# Altium PCB PCB7.PcbDoc (part 2 of 2)
Units mil, origin at the board's own origin, x right, y up, seen from the top; angles counter-clockwise.
Board outline 3935 x 3935 mil, 2 copper layers (Top Layer, Bottom Layer); 49 components, 133 nets, 415 pads, 69 vias.
Unrouted connection lines stored in the file: 1.
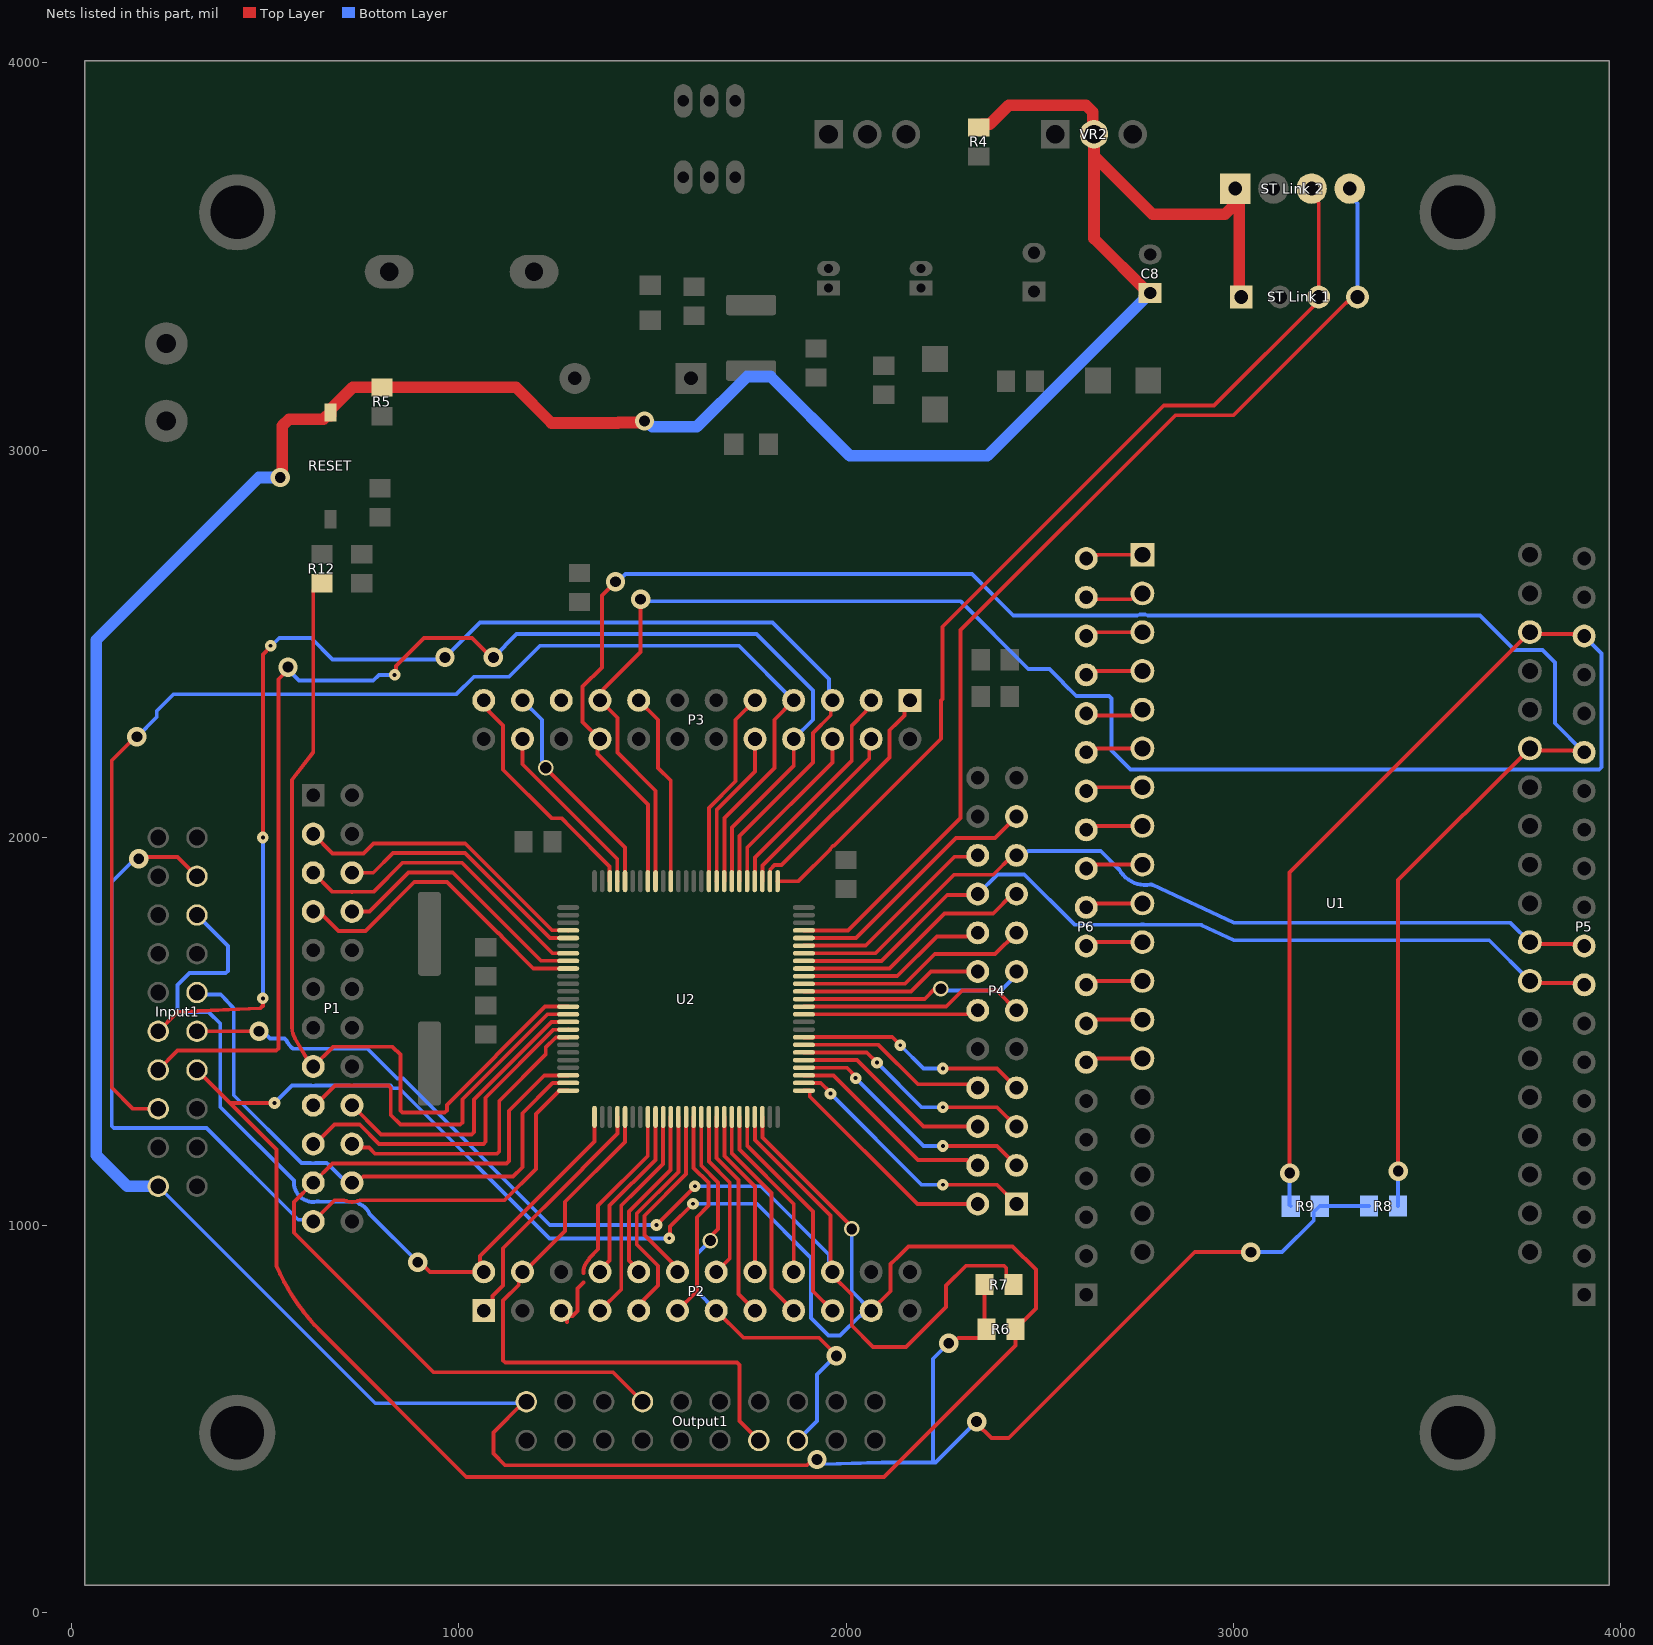
[diagram p2: the nets of this part, all layers, seen from the top]

## Via types
v1: diameter 50, hole 28, Top Layer to Bottom Layer, 38 vias
v2: diameter 30, hole 10, Top Layer to Bottom Layer, 17 vias
v3: diameter 40, hole 28, Top Layer to Bottom Layer, 12 vias
v4: diameter 40, hole 30, Top Layer to Bottom Layer, 1 vias
v5: diameter 47.24, hole 23.62, Top Layer to Bottom Layer, 1 vias

## Nets (pads, with @x,y where several pads share a name; then routed paths per layer and width w, separated by ;. In a path a pad name is that pad's centre, name@x,y a point inside that pad or via, vN(x,y) a via of type N, cw(c..) or ccw(c..) an arc to the next point about the centre after c; other vN are vias at no path point) (continued)
NetP6_7: P6.7 U1.J2-14 | length 145
  Top Layer w10: P6.7@2620,1430 U1.J2-14@2765,1430
NetP6_8: P6.8 U1.J2-13 | length 145
  Top Layer w10: P6.8@2620,1530 U1.J2-13@2765,1530
NetP6_9: P6.9 U1.J2-12 | length 145
  Top Layer w10: P6.9@2620,1630 U1.J2-12@2765,1630
NetP6_10: P6.10 U1.J2-11 | length 145
  Top Layer w10: P6.10@2620,1730 U1.J2-11@2765,1730
NetP6_11: P6.11 U1.J2-10 | length 145
  Top Layer w10: P6.11@2620,1830 U1.J2-10@2765,1830
NetP6_12: P6.12 U1.J2-9 | length 145
  Top Layer w10: P6.12@2620,1930 U1.J2-9@2765,1930
NetP6_13: P6.13 U1.J2-8 | length 145
  Top Layer w10: P6.13@2620,2030 U1.J2-8@2765,2030
NetP6_14: P6.14 U1.J2-7 | length 145
  Top Layer w10: P6.14@2620,2130 U1.J2-7@2765,2130
NetP6_15: P6.15 U1.J2-6 | length 145
  Top Layer w10: P6.15@2620,2230 U1.J2-6@2765,2230
NetP6_16: P6.16 U1.J2-5 | length 153.3
  Top Layer w10: P6.16@2620,2320 2625,2315 2736.09,2315 2751.09,2330 U1.J2-5@2765,2330
NetP6_17: P6.17 U1.J2-4 | length 145
  Top Layer w10: P6.17@2620,2430 U1.J2-4@2765,2430
NetP6_18: P6.18 U1.J2-3 | length 145
  Top Layer w10: P6.18@2620,2530 U1.J2-3@2765,2530
NetP6_19: P6.19 U1.J2-2 | length 157.4
  Top Layer w10: P6.19@2620,2630 2635,2615 2736.09,2615 2751.09,2630 U1.J2-2@2765,2630
NetP6_20: P6.20 U1.J2-1 | length 149.1
  Top Layer w10: P6.20@2620,2720 2629.39,2729.39 2649.77,2729.39 2650.39,2730 U1.J2-1@2765,2730
Pin_04: P1.3 U2.4 | length 782.5
  Top Layer w10: P1.3@625,2009.13 675,1959.13 755,1959.13 780.87,1985 1017.27,1985 1241.49,1760.78 1282.72,1760.78 U2.4@1283.07,1760.43
Pin_05: P1.6 U2.5 | length 670
  Top Layer w10: P1.6@725,1909.13 780,1909.13 830.87,1960 1016.82,1960 1236.07,1740.75 U2.5@1283.07,1740.75
Pin_07: P1.5 U2.7 | length 806.3
  Top Layer w10: P1.5@625,1909.13 671.21,1862.93 674.13,1860 718.77,1860 ccw(c725,1909.13) 731.23,1860 780.87,1860 855.87,1935 1009.13,1935 1242.76,1701.38 U2.7@1283.07,1701.38
Pin_08: P1.8 U2.8 | length 694.4
  Top Layer w10: P1.8@725,1809.13 770,1809.13 870.87,1910 985,1910 1212.96,1682.04 1282.72,1682.04 U2.8@1283.07,1681.69
Pin_09: P1.7 U2.9 | length 809.1
  Top Layer w10: P1.7@640,1809.13 690,1759.13 760,1759.13 885.87,1885 970,1885 1101.67,1753.33 1103.08,1753.33 1110.69,1745.72 1110.69,1744.31 1192.99,1662.01 U2.9@1283.07,1662.01
Pin_15: P1.17 U2.15 | length 895.6
  Top Layer w10: P1.17@640,1319.13 680.87,1360 819.14,1360 825,1354.14 825,1284.13 850,1259.13 1004.14,1259.13 1010,1264.99 1010,1324.54 1229.35,1543.9 U2.15@1283.07,1543.9
Pin_16: P1.18 U2.16 | length 758.6
  Top Layer w10: P1.18@725,1309.13 800,1234.13 1034.14,1234.13 1040,1239.99 1040,1324.13 1239.73,1523.87 1282.72,1523.87 U2.16@1283.07,1524.21
Pin_17: P1.19 U2.17 | length 888.4
  Top Layer w10: P1.19@625,1209.13 630,1209.13 680,1259.13 745,1259.13 795,1209.13 1064.14,1209.13 1070,1214.99 1070,1328.68 1245.5,1504.18 1282.72,1504.18 U2.17@1283.07,1504.53
Pin_18: P1.20 U2.18 | length 779.8
  Top Layer w10: P1.20@725,1209.13 734.39,1199.75 769.07,1199.75 784.69,1184.13 1099.14,1184.13 1105,1189.99 1105,1320 1225,1440 1225,1458.22 1250.84,1484.06 1258.37,1484.06 1258.81,1484.5 1282.72,1484.5 U2.18@1283.07,1484.84
Pin_29: P2.1 U2.29 | length 642.9
  Top Layer w10: P2.1@1065,779.13 1087.63,801.77 1087.63,816.77 1115,844.13 1115,940 1320,1145 1320,1145.86 1404.14,1230 1410,1235.86 U2.29@1410.04,1279.13 U2.29@1410.04,1279.13
Pin_33: P2.5 U2.33 | length 622.5
  Top Layer w10: 1280,749.13 P2.5@1280,765 ; P2.5@1280,790 P2.5@1280,765 ; 1322.53,851.67 1307.53,836.67 1307.53,778.39 1294.14,765 P2.5@1280,765 ; 1322.53,876.68 1322.53,876.92 cw(c1365,879.13) 1334.57,908.85 cw(c1364.82,879.32) 1334.8,909.08 ccw(c1327.67,916.09) 1337.61,915.03 1360,937.42 1360,1050 1488.43,1178.43 1488.43,1278.79 U2.33@1488.78,1279.13
Pin_34: P2.8 U2.34 | length 459.4
  Top Layer w10: P2.8@1365,879.13 1365,883.82 1390,908.82 1390,1050 1508.12,1168.12 1508.12,1278.79 U2.34@1508.46,1279.13
Pin_35: P2.7 U2.35 | length 567.6
  Top Layer w10: P2.7@1365,779.13 1420,834.13 1420,1050 1462,1092 1488,1118 1527.8,1157.8 1527.8,1278.79 U2.35@1528.15,1279.13
Pin_36: P2.10 U2.36 | length 455
  Top Layer w10: P2.10@1465,879.13 1465,883.82 1440,908.82 1440,1035 1547.49,1142.49 1547.49,1278.79 U2.36@1547.83,1279.13
Pin_37: P2.9 U2.37 | length 588
  Top Layer w10: P2.9@1465,779.13 1465,792.41 1478.99,806.39 1478.99,808.12 1515,844.13 1515,895 1460,950 1460,1029.54 1567.52,1137.06 U2.37@1567.52,1279.13
Pin_38: P2.12 U2.38 | length 479.6
  Top Layer w10: P2.12@1565,879.13 1565,889.13 1533,921.13 1533,921.59 1480,974.59 1480,1024.09 1587.2,1131.29 U2.38@1587.2,1279.13
Pin_39: P2.11 U2.39 | length 548.9
  Top Layer w10: P2.11@1565,779.13 1615,829.13 1615,1020 1645,1050 1645,1109.54 1606.89,1147.65 U2.39@1606.89,1279.13
Pin_41: P2.14 U2.41 | length 436.8
  Top Layer w10: U2.41@1646.26,1279.13 1646.26,1163.74 1700,1110 1700,914.13 P2.14@1665,879.13
Pin_42: P2.15 U2.42 | length 541
  Top Layer w10: U2.42@1665.94,1279.13 1665.94,1173.14 1722.47,1116.62 1722.47,821.66 P2.15@1765,779.13
Pin_43: P2.16 U2.43 | length 432.9
  Top Layer w10: U2.43@1685.63,1279.13 1685.98,1278.79 1685.98,1178.57 1765,1099.54 P2.16@1765,879.13
Pin_44: P2.17 U2.44 | length 566.1
  Top Layer w10: U2.44@1705.32,1279.13 1705.32,1184.68 1807.53,1082.47 1807.53,836.61 P2.17@1865,779.13
Pin_45: P2.18 U2.45 | length 458
  Top Layer w10: U2.45@1725,1279.13 1725.35,1278.79 1725.35,1194.65 1865,1055 P2.18@1865,879.13
Pin_46: P2.19 U2.46 | length 567.4
  Top Layer w10: U2.46@1744.69,1279.13 U2.46@1745,1278.82 ; U2.46@1745,1255 1745,1205 1915,1035 1915,829.13 P2.19@1965,779.13
Pin_51: P4.2 U2.51 | length 578.3
  Top Layer w10: U2.51@1891.34,1347.05 1905.55,1347.05 1906.39,1346.21 1906.39,1332 2184.25,1054.13 P4.2@2340,1054.13
Pin_52: P4.1 U2.52 | length 679.6
  Top Layer w10: U2.52@1891.34,1366.73 1934.88,1366.73 1960,1341.61 v2(1960,1339.13) ; v2(2250,1104.13) 2390,1104.13 P4.1@2440,1054.13
  Bottom Layer w10: v2(1960,1339.13) 2195,1104.13 v2(2250,1104.13)
Pin_53: P4.4 U2.53 | length 544.9
  Top Layer w10: U2.53@1891.34,1386.42 1967.72,1386.42 2186.01,1168.12 2312.74,1168.12 2326.73,1154.13 P4.4@2340,1154.13
Pin_54: P4.3 U2.54 | length 655.6
  Top Layer w10: U2.54@1891.34,1406.1 2002.47,1406.1 2025,1383.57 v2(2025,1379.13) ; v2@2240,1204.13 2390,1204.13 P4.3@2440,1154.13
  Bottom Layer w10: v2(2025,1379.13) 2200,1204.13 v2@2240,1204.13
  other v2: 2250,1204.13
Pin_55: P4.6 U2.55 | length 519.8
  Top Layer w10: U2.55@1891.34,1425.79 2028.35,1425.79 2200,1254.13 P4.6@2340,1254.13
Pin_56: P4.5 U2.56 | length 641.2
  Top Layer w10: U2.56@1891.34,1445.47 2053.66,1445.47 v2(2080,1419.13) ; v2@2245,1304.13 2390,1304.13 P4.5@2440,1254.13 P4.5@2426.73,1254.13
  Bottom Layer w10: v2(2080,1419.13) 2195,1304.13 v2@2245,1304.13
  other v2: 2250,1304.13
Pin_57: P4.8 U2.57 | length 494.6
  Top Layer w10: U2.57@1891.34,1465.16 2083.98,1465.16 2185.61,1363.52 2330.61,1363.52 P4.8@2340,1354.13
Pin_58: P4.7 U2.58 | length 627.7
  Top Layer w10: U2.58@1915.97,1484.13 1915.6,1484.5 1891.68,1484.5 U2.58@1891.34,1484.84 2119.29,1484.84 v2(2140,1464.13) ; v2@2240,1404.13 2390,1404.13 P4.7@2440,1354.13
  Bottom Layer w10: v2(2140,1464.13) 2200,1404.13 v2@2240,1404.13
  other v2: 2250,1404.13
Pin_61: P4.12 U2.61 | length 452.9
  Top Layer w10: U2.61@1891.34,1543.9 2316.49,1543.9 2326.73,1554.13 P4.12@2340,1554.13
Pin_62: P4.11 U2.62 | length 586.9
  Top Layer w10: U2.62@1891.34,1563.58 2258.58,1563.58 2300,1605 2389.13,1605 P4.11@2440,1554.13
Pin_63: P4.13 U2.63 | length 592.5
  Top Layer w10: U2.63@1891.34,1583.27 2203.27,1583.27 2230,1610 v3(2245,1610) ; P4.13@2435,1654.13 P4.13@2440,1654.13
  Bottom Layer w10: v3(2245,1610) 2250,1605 2400,1605 2440,1645 P4.13@2440,1654.13
Pin_64: P4.14 U2.64 | length 469.9
  Top Layer w10: U2.64@1891.34,1602.95 2167.95,1602.95 2219.13,1654.13 P4.14@2340,1654.13
Pin_65: P4.15 U2.65 | length 603.1
  Top Layer w10: U2.65@1891.34,1622.64 2152.64,1622.64 2229.13,1699.13 2385,1699.13 P4.15@2440,1754.13
Pin_66: P4.16 U2.66 | length 495
  Top Layer w10: U2.66@1891.34,1642.32 2132.32,1642.32 2234.75,1744.75 2330.61,1744.75 P4.16@2340,1754.13
Pin_67: P4.17 U2.67 | length 628.2
  Top Layer w10: U2.67@1891.34,1662.01 2112.01,1662.01 2254.13,1804.13 2380,1804.13 2430,1854.13 P4.17@2440,1854.13
Pin_70: P4.20 U2.70 | length 545.2
  Top Layer w10: U2.70@1891.34,1721.06 2051.06,1721.06 2280.46,1950.46 2336.33,1950.46 P4.20@2340,1954.13
Pin_71: P4.21 U2.71 | length 678.5
  Top Layer w10: U2.71@1891.34,1740.75 1891.68,1741.1 2026.1,1741.1 2284.13,1999.13 2385,1999.13 P4.21@2440,2054.13
Pin_77: P3.1 U2.77 | length 627.4
  Top Layer w10: U2.77@1803.74,1887.4 1804.09,1887.75 1804.09,1911.67 1804.52,1912.1 1804.52,1917.87 1815.59,1928.95 1833.95,1928.95 2111.83,2206.83 2111.83,2276.83 2135,2300 2135.43,2300 2150.89,2315.46 2150.89,2340.03 P3.1@2165,2354.13
Pin_78: P3.4 U2.78 | length 483.1
  Top Layer w10: U2.78@1784.06,1887.4 1784.06,1928.19 2060,2204.13 2060,2249.13 P3.4@2065,2254.13
Pin_79: P3.3 U2.79 | length 591.3
  Top Layer w10: U2.79@1764.37,1887.4 1764.72,1887.75 1764.72,1948.85 2015,2199.13 2015,2289.13 2051.01,2325.15 2051.01,2326.87 2065,2340.86 P3.3@2065,2354.13
Pin_80: P3.6 U2.80 | length 458
  Top Layer w10: U2.80@1744.69,1887.4 1745.03,1887.75 1745.03,1974.17 1965,2194.13 P3.6@1965,2254.13
Pin_84: P3.10 U2.84 | length 407.8
  Top Layer w10: U2.84@1665.94,1887.4 1666.29,1887.75 1666.29,2071.29 1765,2170 P3.10@1765,2254.13
Pin_85: P3.9 U2.85 | length 515.9
  Top Layer w10: U2.85@1646.26,1887.4 1646.26,2076.72 1715,2145.46 1715,2304.13 P3.9@1765,2354.13
Pin_90: P3.15 U2.90 | length 501
  Top Layer w10: P3.15@1465,2354.13 1515,2304.13 1515,2180 1547.83,2147.17 U2.90@1547.83,1887.4
Pin_94: P3.19
Pin_96: P3.21 U2.96 | length 580.5
  Top Layer w10: P3.21@1165,2350 P3.21@1165,2354.13 ; v4(1225,2180) 1225,2179.13 1429.72,1974.41 U2.96@1429.72,1887.4
  Bottom Layer w10: P3.21@1165,2354.13 1215,2304.13 1215,2198.12 1225,2188.12 v4(1225,2180)
Pin_97: P3.22 U2.97 | length 468.2
  Top Layer w10: P3.22@1165,2254.13 1165,2189.13 1409.78,1944.35 1409.78,1887.66 U2.97@1410.04,1887.4
Pin_98: P3.23 U2.98 | length 616.3
  Top Layer w10: P3.23@1065,2354.13 1065,2340.86 1078.99,2326.87 1078.99,2325.15 1115,2289.13 1115,2175 1240,2050 1265.35,2050 1288.79,2026.56 1390.01,1925.34 1390.01,1887.75 U2.98@1390.35,1887.4
PUlSE_STEPPER: Output1.4 P1.21 U2.23 | length 2079.5
  Top Layer w10: U2.23@1283.07,1386.42 1221.42,1386.42 1130,1295 1130,1164.99 1124.14,1159.13 675,1159.13 P1.21@625,1109.13 575,1059.13 575,980 935,620 1399.13,620 Output1.4@1475,544.13
PWML: Output1.18 P2.13 U2.40 | length 1185.4
  Top Layer w10: U2.40@1626.57,1279.13 1626.57,1153.43 1670,1110 1670,990 1654.31,974.31 1654.31,964.31 v3(1650,960) ; P2.13@1665,782.59 P2.13@1665,779.13 1735,709.13 1930,709.13 1975.25,663.89 v1(1975.25,662.36)
  Bottom Layer w10: v3(1650,960) 1615,925 1615,829.13 P2.13@1665,779.13 ; Output1.18@1875,444.13 1925,494.13 1925,614.13 1973.23,662.36 v1(1975.25,662.36)
PWMR: Output1.17 P2.4 U2.30 | length 1598.5
  Top Layer w10: P2.4@1165,879.13 1155.61,869.75 1155.61,845.61 1115,805 1115,650.86 1120.86,645 1719.14,645 1725,639.14 1725,494.13 Output1.17@1775,444.13 ; P2.4@1170,880 1275,985 1275,1060 1429.72,1214.72 U2.30@1429.72,1279.13
  Bottom Layer w10: Output1.17@1775,444.13 Output1.17@1783.63,452.77
Reset: P1.15 R12.2 U2.14 | length 2248.9
  Top Layer w10: R12.2@647.61,2656.56 643.67,2656.56 625.05,2637.94 625.05,2220.05 570.47,2149.02 570.47,1509.13 ccw(c625,1509.13) 578.11,1481.31 615,1419.13 P1.15@625,1409.13 675.87,1460 830,1460 850,1440 850,1295.86 855.86,1290 964.14,1290 970,1295.86 970,1310 1223.58,1563.58 U2.14@1283.07,1563.58
RX_ESP32: P4.19 P5.10 U1.J3-11 U2.69 | length 2203.9
  Top Layer w10: U2.69@1891.34,1701.38 2076.38,1701.38 2279.13,1904.13 2380,1904.13 2430,1954.13 P4.19@2440,1954.13 ; U1.J3-11@3765,1730 3770,1725 3900,1725 P5.10@3905,1720
  Bottom Layer w10: P4.19@2440,1954.13 2449.39,1963.52 2468.91,1963.52 2470.39,1965 2657.5,1965 2703.7,1918.8 2704.07,1918.43 2704.95,1917.55 ccw(c2776.91,1959.88) 2743.87,1883.21 ccw(c2771.81,1948.06) 2785.31,1878.75 2786.24,1878.75 2788.45,1878.75 2790.45,1877.82 3000.96,1780 3715,1780 3717.93,1777.07 U1.J3-11@3765,1730
RX_HC05: Input1.18 P2.2 U2.26 | length 2120.7
  Top Layer w10: v1(895,904.13) 901.57,904.13 926.57,879.13 P2.2@1065,879.13 1055.61,888.52 1055.61,920.61 1350.98,1215.98 U2.26@1350.98,1279.13
  Bottom Layer w10: Input1.18@325,1800 405,1720 405,1655.86 399.14,1650 306.95,1650 305.48,1650 275,1619.52 275,1555.86 280.86,1550 355,1550 385,1520 385,1305 575.49,1114.51 575.49,1110.37 cw(c565.49,1110.37) 575.48,1110.26 ccw(c625,1109.13) 589.82,1074.27 ; 589.83,1074.27 ccw(c619.39,1103.53) 589.98,1074.11 ccw(c625,1109.13) 634.45,1060.52 cw(c636.33,1050.7) 640,1060 643.76,1060 718.77,1060 ccw(c725,1109.13) 731.23,1060 739.13,1060 742.06,1057.07 743.15,1055.98 744.45,1054.68 cw(c725,1009.13) 770.55,1028.59 771.85,1027.28 v1(895,904.13)
SCL_ESP32: P3.17 P5.18 R9.1 U1.J3-3 U2.92 | length 5968.1
  Top Layer w10: v1(1470,2615) 1470,2479.13 1374.39,2383.52 1374.39,2363.52 P3.17@1365,2354.13 1410,2309.13 1410,2219.13 1508.46,2120.67 U2.92@1508.46,1887.4 ; v1(3145,1134.13) 3145,1910 U1.J3-3@3765,2530 3770,2525 3900,2525 P5.18@3905,2520
  Bottom Layer w10: v1(1470,2615) 1475,2610 2295,2610 2470.39,2434.61 2525.39,2434.61 2560,2400 2560,2399.06 2594.06,2365 2679.14,2365 2685,2359.14 2685,2225 2731.6,2178.4 2734.53,2175.47 2760.36,2175.47 cw(c2765,2130) 2769.64,2175.47 3760.36,2175.47 cw(c3765,2130) 3769.64,2175.47 3943.67,2175.47 3949.53,2181.33 3949.53,2475.47 P5.18@3905,2520 3905,2525 3905,2530 3900,2525 3770,2525 U1.J3-3@3765,2530 ; v1(3145,1134.13) 3145,1051.69 R9.1@3147.77,1048.92
SCL_Oled: Input1.15 P2.20 R7.1 U2.47 | length 3211.3
  Top Layer w10: Input1.15@325,1500 v1(485,1500) ; v2(1511,1000) 1511,1000.6 1610,1099.6 v2(1610,1100) ; U2.47@1764.37,1279.13 U2.47@1764.72,1278.79 ; U2.47@1765,1260 1765,1219.54 1960,1024.54 1960,884.13 P2.20@1965,879.13 ; P2.20@1965,870 2015,820 2015,740 2070,685 2155,685 2258.55,788.55 2258.55,843.55 2310,895 2407.75,895 2413.61,889.14 2413.61,865.15 R7.1@2432.23,846.53
  Bottom Layer w10: v1(485,1500) 495,1500 497.93,1497.07 510.48,1484.52 513.41,1481.59 550.99,1481.59 553.92,1478.66 554.86,1477.73 ; 554.86,1477.72 ccw(c648.15,1530.59) 555.49,1476.63 ccw(c648.15,1530.59) 569.05,1458.19 ccw(c576.38,1465) 576.3,1455 765,1455 842,1378 857.46,1378 1235.46,1000 v2(1511,1000) ; v2(1610,1100) 1780,1100 1955.61,924.39 1955.61,888.52 P2.20@1965,879.13
SDA_ESP32: P3.18 P5.15 R8.1 U1.J3-6 U2.93 | length 5139.7
  Top Layer w10: v1(1405,2660) 1370,2625 1370,2439.13 1320.47,2389.61 1320.47,2298.66 P3.18@1365,2254.13 1358.67,2247.8 1358.67,2215.46 1488.78,2085.35 U2.93@1488.78,1887.4 ; v1(3425,1139.13) 3425,1890 U1.J3-6@3765,2230 3770,2225 3900,2225 P5.15@3905,2220
  Bottom Layer w10: v1(1405,2660) 1410.86,2660 1430.86,2680 2325,2680 2431.57,2573.43 2749.26,2573.43 ccw(c2749.22,2583.43) 2752.02,2573.83 cw(c2765,2530) 2778.01,2573.82 ccw(c2780.78,2583.43) 2780.72,2573.43 3636.01,2573.43 3725.15,2484.29 3797.41,2484.29 3830,2451.71 3830,2295 P5.15@3905,2220 ; R8.1@3424.46,1049.13 3425,1049.68 v1(3425,1139.13)
SDA_Oled: Input1.14 P2.21 R6.1 U2.48 | length 6429.2
  Top Layer w10: Input1.14@325,1400 410,1315 ; v2(525,1315) 410,1315 ; v2(1543.96,966.04) 1546.04,968.11 1546.04,996.04 v2(1605,1055) ; U2.48@1784.06,1279.13 1784.4,1278.79 1784.4,1225.6 2015,995 v3(2015,990) ; P2.21@2065,779.13 2115,829.13 2115,899.13 2128.78,912.91 cw(c2165,879.13) 2131.22,915.36 2160.87,945 2430,945 2490,885 2490,785 2459.09,754.09 2455.85,754.09 2437.23,735.47 2437.23,688.97 2303.26,555 2098.26,350 1020,350 646.26,723.74 cw(c1035.33,1112.81) 530,895.11 530,1195 410,1315
  Bottom Layer w10: v2(525,1315) 570,1360 618.17,1360 ; 618.21,1360 cw(c618.17,1350) 619.34,1359.93 ccw(c625,1409.13) 630.72,1359.94 cw(c631.83,1350) 631.83,1360 718.17,1360 ; 718.21,1360 cw(c718.17,1350) 719.34,1359.93 ccw(c725,1409.13) 730.72,1359.94 cw(c731.83,1350) 731.83,1360 824.64,1360 831.64,1353 847,1353 1235,965 1542.93,965 v2(1543.96,966.04) ; v2(1605,1055) 1770,1055 1910,915 1910,760 1955,715 1985,715 2035.58,765.58 2038.17,765.58 2051.73,779.13 P2.21@2065,779.13 2015,829.13 v3(2015,990)
Start_Button: Input1.3 P3.7 U2.83 | length 3477.7
  Top Layer w10: v1(170,2260) 165.82,2260 105,2199.18 105,1355 160,1300 Input1.3@225,1300 ; U2.83@1685.63,1887.4 1685.98,1887.75 1685.98,2050.98 1815,2180 1815,2304.13 P3.7@1865,2354.13
  Bottom Layer w10: v1(170,2260) 221.33,2311.33 221.33,2326.33 265,2370 995,2370 1040,2415 1130,2415 1210,2495 1724.13,2495 P3.7@1865,2354.13
Stop_Button: Input1.4 P3.8 U2.82 | length 3442.3
  Top Layer w10: Input1.4@225,1400 275,1450 529.14,1450 535,1455.86 535,2408.43 560,2433.43 v1(560,2440) ; v2(835,2420) 838.83,2423.83 838.83,2443.16 910.67,2515 1035,2515 1085,2465 v1(1090,2465) ; U2.82@1705.32,1887.4 1705.66,1887.75 1705.66,2025.66 1865,2185 P3.8@1865,2254.13
  Bottom Layer w10: v1(560,2440) 560,2433.64 588.64,2405 780,2405 795,2420 v2(835,2420) ; v1(1090,2465) 1150,2525 1769.13,2525 1915,2379.13 1915,2304.13 P3.8@1865,2254.13
SWCLK: "ST Link 1.3" "ST Link 2.3" U2.76 | length 2482.6
  Top Layer w10: U2.76@1823.43,1887.4 1877.4,1887.4 1959.31,1969.31 1959.31,1971.24 1966.92,1978.85 1968.85,1978.85 2245,2255 2245,2353.87 2249.18,2358.05 2249.18,2544.18 2820,3115 2950,3115 3219.93,3384.93 3219.93,3638.04 3201.57,3656.4 3201.57,3675
SWDIO: "ST Link 1.4" "ST Link 2.4" U2.72 | length 2678
  Top Layer w10: U2.72@1891.34,1760.43 2005.43,1760.43 2295.47,2050.47 2295.47,2535.47 2850,3090 3000,3090 3291.01,3381.01 3292.6,3381.01 3306.66,3395.07 3319.93,3395.07
  Bottom Layer w10: 3300,3675 3300,3656.4 3319.93,3636.47 3319.93,3395.07
TX_ESP32: P4.18 P5.9 U1.J3-12 U2.68 | length 2216.6
  Top Layer w10: U2.68@1891.34,1681.69 2091.69,1681.69 2261.33,1851.33 2337.2,1851.33 P4.18@2340,1854.13 ; U1.J3-12@3765,1630 3770,1625 3900,1625 P5.9@3905,1620
  Bottom Layer w10: P4.18@2340,1854.13 2390.87,1905 2460,1905 2587.07,1777.93 2590,1775 2756.98,1775 cw(c2765,1730) 2773.02,1775 2915.44,1775 2917.44,1774.07 3001.52,1735 3660,1735 U1.J3-12@3765,1630
TX_HC05: Input1.19 P1.23 U2.25 | length 2401
  Top Layer w10: v1(175,1945.43) 179.57,1950 275,1950 Input1.19@325,1900 ; P1.23@625,1009.13 680,1064.13 704.31,1064.13 ccw(c725,1109.13) 745.69,1064.13 1119.13,1064.13 1200,1145 1200,1286.12 1260.92,1347.05 U2.25@1283.07,1347.05
  Bottom Layer w10: v1(175,1945.43) 165.43,1945.43 105,1885 105,1255.86 110.86,1250 350,1250 586.45,1013.55 620.58,1013.55 P1.23@625,1009.13
USER_Button: Input1.5 P3.5 U2.81 | length 3428.1
  Top Layer w10: Input1.5@225,1500 272.48,1547.48 275.23,1550.23 327.11,1552.49 489.32,1559.54 492.07,1562.29 495,1565.22 v2(495,1585) ; v2(495,2000) 495,2472.57 515,2492.57 v2(515,2495) ; U2.81@1725,1887.4 1725.35,1887.75 1725.35,2004.48 1915,2194.13 1915,2270 1960.58,2315.58 1960.58,2349.72 P3.5@1965,2354.13
  Bottom Layer w10: v2(495,1585) v2(495,2000) ; v2(515,2495) 517.43,2495 537.43,2515 620,2515 675,2460 960,2460 1055,2555 1810,2555 1956.01,2408.99 1956.01,2363.12 P3.5@1965,2354.13
  other v1: 965,2465
Var: Input1.16 P1.22 U2.24 | length 1481.9
  Top Layer w10: P1.22@725,1109.13 738.27,1109.13 754.14,1125 1140.87,1125 1165,1149.13 1165,1288.68 1243.05,1366.73 U2.24@1283.07,1366.73
  Bottom Layer w10: Input1.16@325,1600 330.09,1594.91 386.17,1594.91 389.1,1591.98 ; 389.11,1591.97 389.19,1591.89 389.25,1591.83 cw(c382.03,1584.91) 389.31,1591.77 417.25,1562.38 420,1559.48 420,1335 592.07,1162.93 595,1160 618.77,1160 ccw(c625,1209.13) 631.23,1160 660,1160 662.93,1157.07 696.45,1123.55 697.31,1123.55 711.73,1109.13 P1.22@725,1109.13
VCC: "ST Link 1.1" "ST Link 2.1" C8.1 Input1.1 Output1.1 R4.2 R5.2 R6.2 R7.2 R8.2 R9.2 RESET.2 VR2.2 | length 11035
  Top Layer w10: Output1.1@1165,540 1090,465 1090,410 1120,380 1899.18,380 1914.18,395 v1(1925,395) ; Output1.1@1175,539.14 Output1.1@1175,544.13 ; v1(2265,695) 2275.82,695 2289.79,708.97 2343.8,708.97 2357.43,722.59 R6.2@2357.43,740.47 ; v1(2337.14,492.86) 2337.14,487.86 2375,450 2420,450 2900,930 v1(3045,930) ; R7.2@2357.43,846.53 R6.2@2357.43,740.47 ; R6.2@2362.43,731.53 R6.2@2362.43,733.5 ; R6.2@2362.43,735.47 R6.2@2357.43,740.47
  Top Layer w30: v1@545,2949.13 545,3062.43 562.57,3080 651.68,3080 659.99,3088.31 669.25,3088.31 670,3089.06 RESET.2@670,3096.93 670.75,3097.68 670.75,3105.55 726.91,3161.71 R5.2@802.39,3161.71 1148.29,3161.71 1240,3070 1411.57,3070 1412.74,3071.17 1476.17,3071.17 v1(1480,3075) ; R4.2@2342.39,3832.57 2351.02,3841.2 2371.2,3841.2 2420,3890 2619.43,3890 2637.01,3872.43 2637.01,3817.99 VR2.2@2640,3815 2640,3759.13 ; C8.1@2785,3405 2781.06,3405 2640,3546.06 2640,3759.13 ; 3004.72,3675 3004.72,3634.72 2978.2,3608.2 2790.93,3608.2 2640,3759.13 ; 3014.86,3634.72 3014.86,3400.14 3019.93,3395.07
  Bottom Layer w10: Input1.1@225,1100 785,540 1170.87,540 Output1.1@1175,544.13 ; v1(1925,395) 1925,392.67 1934.99,382.68 2092.59,386.85 2092.78,386.85 2092.88,386.85 2092.96,386.86 2225,386.86 ; v1(2265,695) 2225,655 2225,386.86 ; v1(2337.14,492.86) 2231.14,386.86 2225,386.86 ; v1(3045,930) 3125,930 3207.22,1012.22 3207.22,1033.57 R9.2@3222.57,1048.92 3349.44,1048.92 R8.2@3349.65,1049.13
  Bottom Layer w30: Input1.1@225,1100 145,1100 65,1180 65,2510 484.13,2929.13 v1(540,2929.13) ; v1(1480,3075) 1485.41,3075 1500.41,3060 1615,3060 1745,3190 1805,3190 2010,2985 2365,2985 2770.47,3390.47 2770.47,3394.41 2781.06,3405 C8.1@2785,3405
pads on no net: Input1.9 Input1.10 Input1.20 Output1.3 Output1.6 Output1.7 Output1.8 Output1.9 Output1.10 Output1.19 Output1.20 P1.9 P1.10 P1.11 P1.12 P1.13 P1.14 P1.16 P1.24 P2.22 P2.23 P2.24 P3.2 P3.24 P4.22 P5.1 P5.20 P6.1 SW1.0 U2.6 U2.21 U2.49 U2.73 Y1.0

## Polygon pours and split planes (outlines as drawn)
GND on Top Layer "GND_L01_P000" (solid, pour order 0): 35,4005 3970,4005 3970,70 35,70
GND on Bottom Layer "GND_L02_P001" (solid, pour order 1): 35,4005 3970,4005 3970,70 35,70

## Keep-outs
Keep-Out Layer:
  lines w10: 15,55 3985,55 3985,4020 15,4020 15,55

## Silkscreen, mask and mechanical layers (free items; w line width, h text height)
Top Overlay:
  text "VCC" at 2928,3293 h30
  text "GND" at 3058,3293 h30
  text "SWCLK" at 3173,3293 h30
  text "SWDIO" at 3353,3293 h30
  text "ESP32" at 3100,3130 h80
  text "PE1" at 1052,2433 h40 r90
  text "PB9" at 1187,2433 h40 r90
  text "PB6" at 1387,2433 h40 r90
  text "PB4" at 1487,2433 h40 r90
  text "PD7" at 1587,2433 h40 r90
  text "PD6" at 1687,2433 h40 r90
  text "PD4" at 1787,2433 h40 r90
  text "PD2" at 1887,2433 h40 r90
  text "PD0" at 1987,2433 h40 r90
  text "PA15" at 2197,2433 h40 r90
  text "BOOT0" at 1272,2428 h40 r90
  text "PC11" at 2112,2428 h40 r90
  text "GND" at 2508,2143 h40
  text "3.3V" at 2133,2133 h40
  text "PE3" at 441.32,2108 h40
  text "PE2" at 798,2108 h40
  text "PD1" at 1887,2061.33 h40 r90
  text "PE0" at 1187,2048 h40 r90
  text "PB8" at 1287,2048 h40 r90
  text "PB5" at 1487,2048 h40 r90
  text "PD5" at 1687,2048 h40 r90
  text "PD3" at 1787,2048 h40 r90
  text "A12" at 2508,2043 h40
  text "PB3" at 1587,2018 h40 r90
  text "PC12" at 1987,2014.68 h40 r90
  text "PC10" at 2082,2014.68 h40 r90
  text "PB7" at 1387,2008 h40 r90
  text "PE5" at 441.32,1999.67 h40
  text "PE4" at 798,1998 h40
  text "A11" at 2048,1943 h40
  text "A10" at 2173,1943 h40
  text "PE6" at 798,1918 h40
  text "PC13" at 408,1891.33 h40
  text "A9" at 2053,1843 h40
  text "A8" at 2178,1843 h40
  text "PC14" at 798,1833 h40
  text "PC15" at 408,1783 h40
  text "C9" at 2053,1743 h40
  text "C8" at 2178,1743 h40
  text "C7" at 2053,1643 h40
  text "C6" at 2178,1643 h40
  text "D14" at 2053,1543 h40
  text "D15" at 2178,1543 h40
  text "D12" at 2053,1443 h40
  text "D13" at 2178,1443 h40
  text "Reset" at 388,1383 h40
  text "D10" at 2053,1343 h40
  text "D11" at 2178,1343 h40
  text "PC1" at 408,1293 h40
  text "PC2" at 798,1283 h40
  text "D8" at 2053,1243 h40
  text "D9" at 2178,1243 h40
  text "PC4" at 798,1188 h40
  text "PC3" at 448,1185.5 h40
  text "B14" at 2053,1143 h40
  text "B15" at 2178,1143 h40
  text "PA1" at 798,1093 h40
  text "PA0" at 448,1086.75 h40
  text "B12" at 2053,1043 h40
  text "B13" at 2178,1043 h40
  text "PA2" at 448,988 h40
  text "PA5" at 1192,963 h40 r90
  text "PA7" at 1292,963 h40 r90
  text "PC5" at 1392,963 h40 r90
  text "PB1" at 1492,963 h40 r90
  text "PE7" at 1592,963 h40 r90
  text "PE10" at 1692,963 h40 r90
  text "PE12" at 1792,963 h40 r90
  text "PE14" at 1892,963 h40 r90
  text "PB10" at 1992,963 h40 r90
  text "PA3" at 1087,958 h40 r90
  text "NAP TEAM" at 145,640 h60 r270
  text "PA4" at 1087,596.32 h40 r90
  text "PA6" at 1192,596.32 h40 r90
  text "PC4" at 1292,596.32 h40 r90
  text "PB0" at 1392,596.32 h40 r90
  text "PB2" at 1492,596.32 h40 r90
  text "PE8" at 1592,596.32 h40 r90
  text "PE9" at 1692,596.32 h40 r90
  text "PE11" at 1792,576.33 h40 r90
  text "PB11" at 2092,576.33 h40 r90
  text "PE13" at 1892,563 h40 r90
  text "PE15" at 1992,563 h40 r90
  text "Microcontroller Board V1.0" at 530,130 h120

## Text inside footprints (layer, text, board x,y; h text height)
P1: Top Overlay "24" at 705,949.13 h50 r270; Top Overlay "23" at 605,949.13 h50 r270; Top Overlay "2" at 705,2209.13 h50 r270; Top Overlay "1" at 605,2209.13 h50 r270
P2: Top Overlay "1" at 965,759.13 h50; Top Overlay "2" at 965,859.13 h50; Top Overlay "23" at 2225,759.13 h50; Top Overlay "24" at 2225,859.13 h50
P3: Top Overlay "24" at 905,2230 h50; Top Overlay "23" at 905,2345 h50; Top Overlay "2" at 2240,2230 h50; Top Overlay "1" at 2255,2345 h50
P4: Top Overlay "24" at 2360,2214.13 h50 r90; Top Overlay "23" at 2460,2214.13 h50 r90; Top Overlay "2" at 2360,954.13 h50 r90; Top Overlay "1" at 2460,954.13 h50 r90